# Altium PCB PCB2.PcbDoc
Units mil, origin at the board's own origin, x right, y up, seen from the top; angles counter-clockwise.
Board outline 2500 x 1400 mil, 2 copper layers (Top Layer, Bottom Layer); 26 components, 16 nets, 89 pads, 0 vias.
Unrouted connection lines stored in the file: 36.
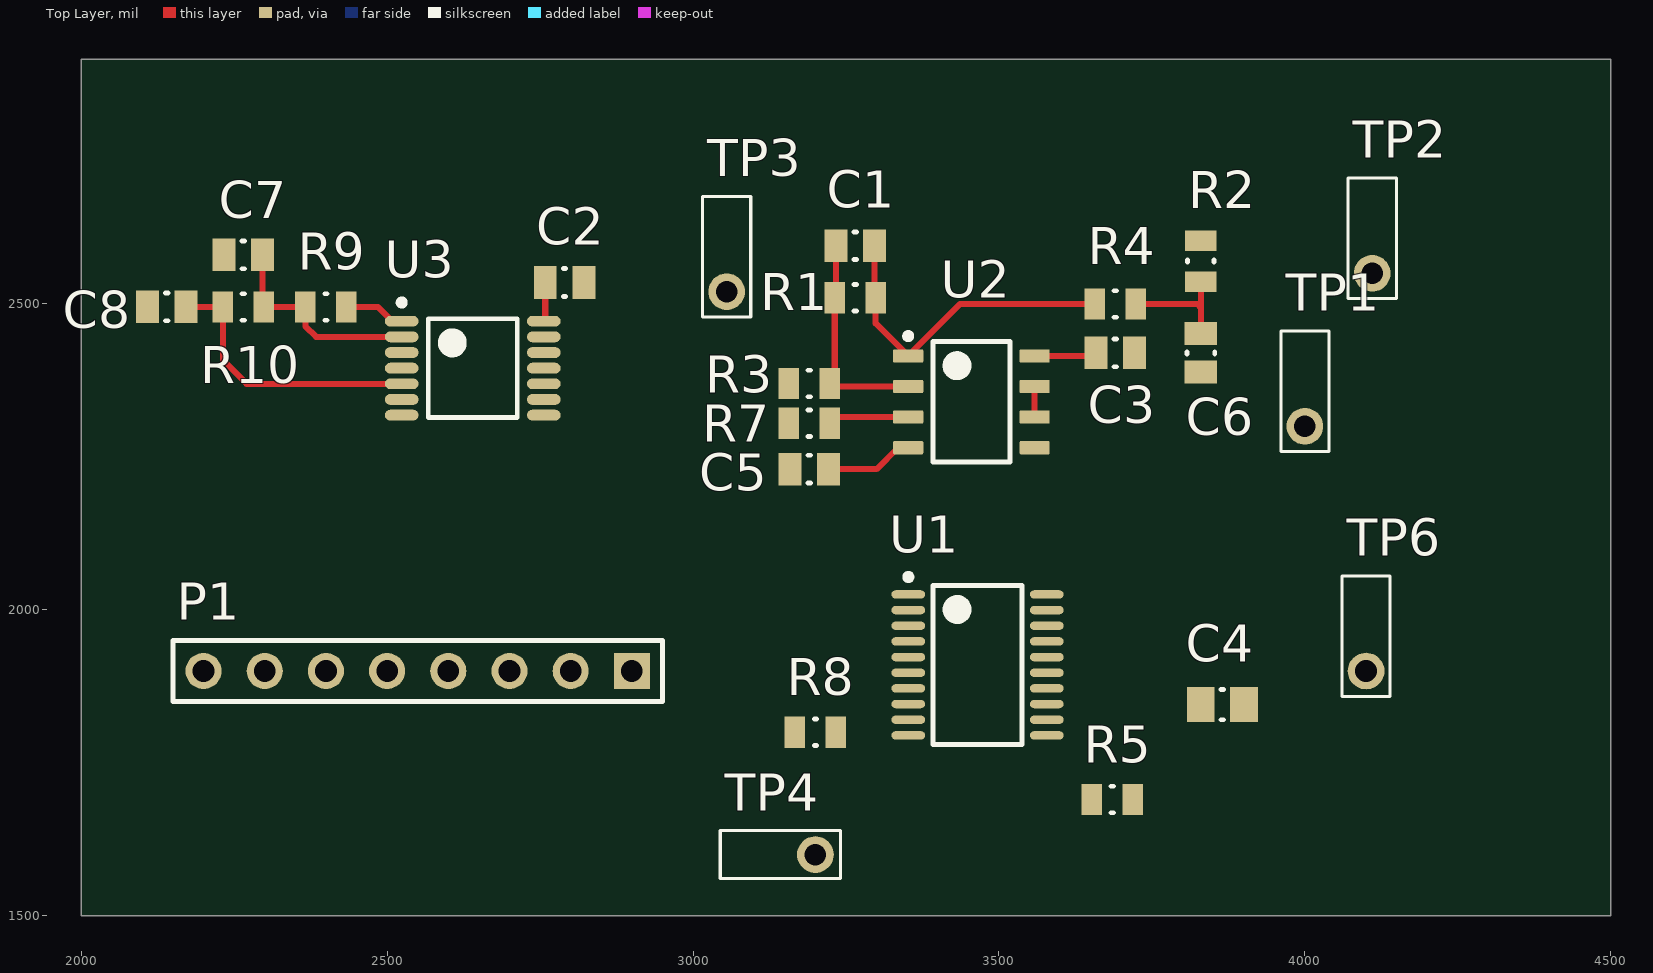
[diagram p0: Top Layer view]
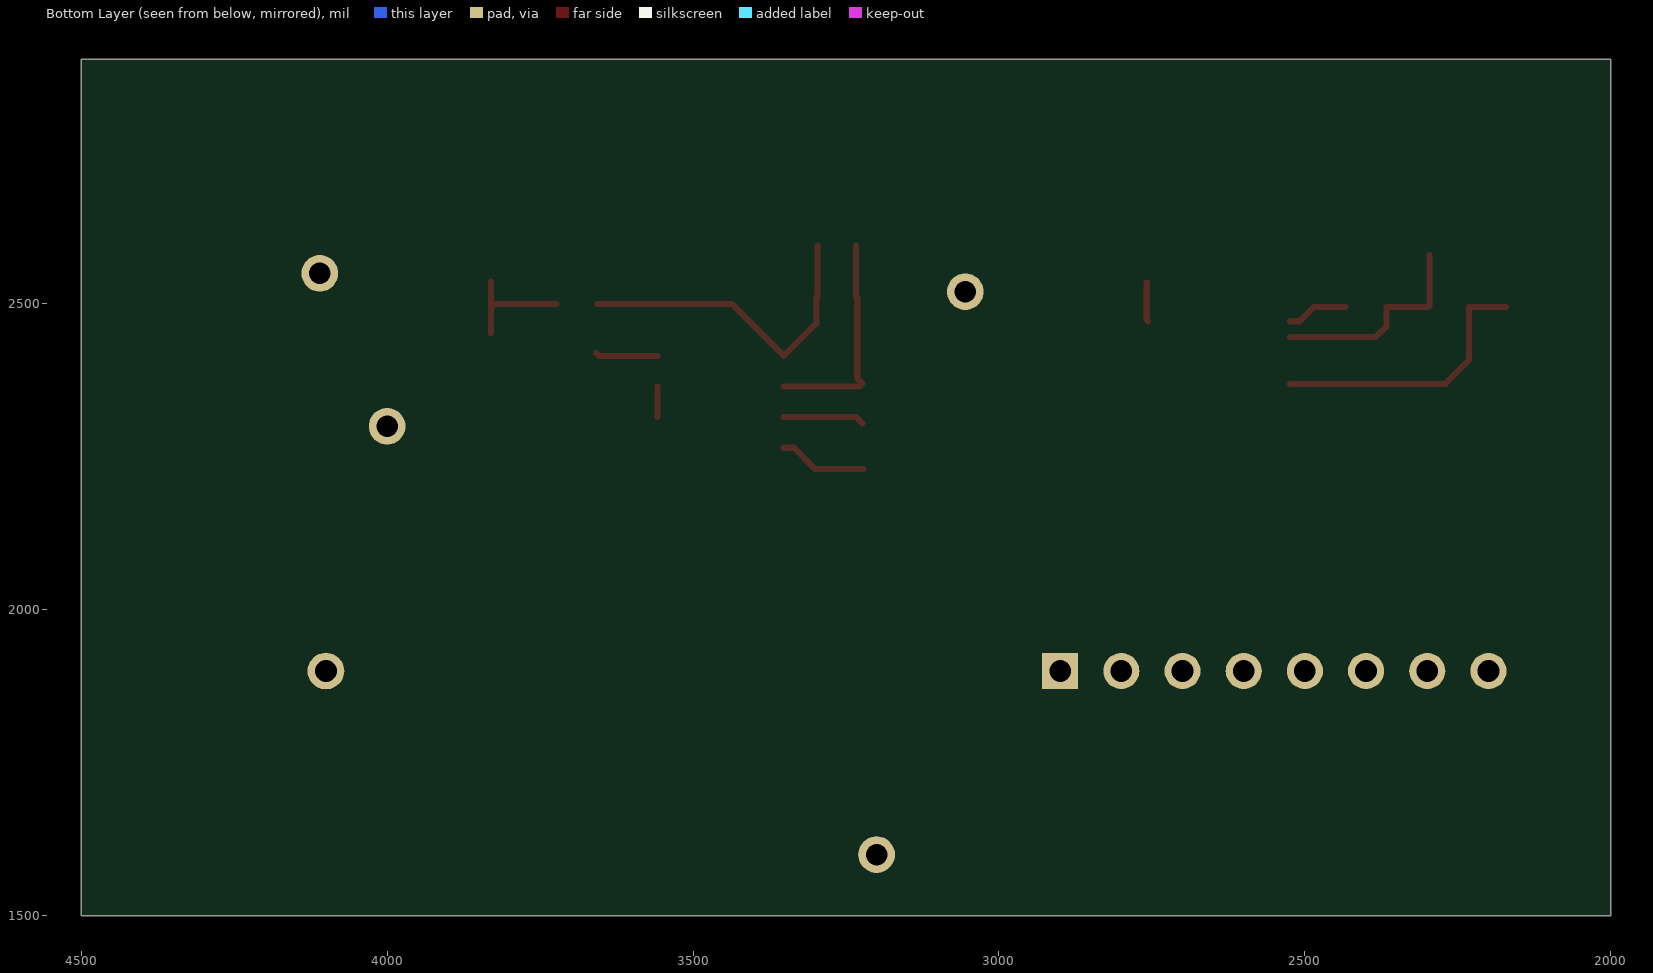
[diagram p1: Bottom Layer view, seen from below]

## Layer stack, top to bottom
Top Solder: solder mask 0.4, Solder Resist, Dk 3.5
Top Layer: signal copper 1.4
Dielectric 1: dielectric 12.6, FR-4, Dk 4.8
Bottom Layer: signal copper 1.4
Bottom Solder: solder mask 0.4, Solder Resist, Dk 3.5

## Board outline
2000,1500 4500,1500 4500,2900 2000,2900

## Design rules (kind name [scope] priority, off if disabled: settings)
Clearance [All] p1: gap=10 ignorepadtopadclearanceinfootprint=FALSE except(0: Arc-Hole Track-Hole SMDPad-Hole THPad-Hole Via-Hole Fill-Hole Poly-Hole Region-Hole Text-Hole)
PolygonConnect [All] p1: connectstyle=Relief reliefconductorwidth=10 reliefentries=4 polygonreliefangle="90 Angle" airgapwidth=10
RoutingVias [All] p1: holewidth=28 width=50 viastyle="Through Hole" minholewidth=28 minwidth=50 maxholewidth=28 maxwidth=50
SolderMaskExpansion [All] p1: expansion=4
Width [All] p1: maxlimit=10 minlimit=10 preferedwidth=10
30 further rules are at their usual default settings.

## Components (designator, comment, footprint, x,y, rotation, side; value= is the part's Value field where it differs from the comment)
C1 "470nF" CAPC0805(2012)75_L 3265,2595 r0 top value=.47uF
C2 ".1uF" CAPC0805(2012)75_L 2790,2535 r180 top
C3 ".1uF" CAPC0805(2012)75_L 3690,2420 r0 top
C4 "CAP CER 0.1UF 25V X7R 0805" CAPC0805(2012)145_N 3865,1845 r0 top
C5 ".1uF" CAPC0805(2012)75_L 3190,2230 r180 top
C6 "22uF" CAPC0805(2012)75_L 3830,2420 r90 top
C7 ".001uF" CAPC0805(2012)75_L 2265,2580 r0 top
C8 "470Pf" CAPC0805(2012)75_L 2140,2495 r0 top
P1 "Header 8" HDR1X8 2900,1900 r180 top
R1 "300k" RESC0805(2012)_L 3265,2510 r180 top
R2 "100k" RESC0805(2012)_L 3830,2570 r90 top
R3 "18.2k" RESC0805(2012)_L 3190,2370 r180 top
R4 "511k" RESC0805(2012)_L 3690,2500 r180 top
R5 "DNP" RESC0805(2012)_L 3685,1690 r0 top value=0
R7 "33k" RESC0805(2012)_L 3190,2305 r0 top
R8 "0" RESC0805(2012)_L 3200,1800 r0 top
R9 "43.2K" RESC0805(2012)_L 2400,2495 r180 top
R10 "10K" RESC0805(2012)_L 2265,2495 r0 top
TP1 "TP-TH-C-152-H90" TP-TH-C-152-H90 4000,2300 r90 top
TP2 "TP-TH-C-152-H90" TP-TH-C-152-H90 4110,2550 r90 top
TP3 "TP-TH-C-152-H90" TP-TH-C-152-H90 3055,2520 r90 top
TP4 "TP-TH-C-152-H90" TP-TH-C-152-H90 3200,1600 r180 top
TP6 "TP-TH-C-152-H90" TP-TH-C-152-H90 4100,1900 r90 top
U1 "MAX333CWP+" TSOP65P640X90-20N 3465,1910 r0 top
U2 "LPC662AIM" D0008A_L 3455,2340 r0 top
U3 "MC14584BDTR2G" MC14584BDTR2G 2640,2395 r0 top

## Footprints (in the part's own frame and the unit in brackets; to place one, negate y for a bottom-side part, rotate by r counter-clockwise, add the part's x,y. Pads: shape width x height; smd on the part's side, far side on the other; paste and mask are expansions set on the pad)
CAPC0805(2012)75_L [mm] "Chip Capacitor, Body 2.0x1.2mm, Height 0.75mm, IPC High Density"
  rect 0.95x1.35 smd: 1(-0.8,0) 2(0.8,0)
  silkscreen extent -0.05,-0.58 0.05,0.58, body extent -1.1,-0.72 1.1,0.72, height 0.75
CAPC0805(2012)145_N [mm] "Chip Capacitor, Body 2.0x1.2mm, Height 1.45mm, IPC Medium Density"
  rect 1.15x1.45 smd: 1(-0.9,0) 2(0.9,0)
  silkscreen extent -0.05,-0.62 0.05,0.63, body extent -1.1,-0.72 1.1,0.73, height 1.45
D0008A_L [mm] "SOIC, 8-Leads, Body 5x4mm, Pitch 1.27mm, IPC High Density"
  rrect18% 1.25x0.55 smd: 1(-2.625,1.905) 2(-2.625,0.635) 3(-2.625,-0.635) 4(-2.625,-1.905) 5(2.625,-1.905) 6(2.625,-0.635) 7(2.625,0.635) 8(2.625,1.905)
  silkscreen extent -2.75,-2.5 1.6,2.85, body extent -3,-2.45 3,2.45, height 1.63
HDR1X8 [mm] "Connector; Header; 8 Position"
  rect 1.5x1.5 hole 0.9: 1(0,0)
  round 1.5 hole 0.9: 2(2.54,0) 3(5.08,0) 4(7.62,0) 5(10.16,0) 6(12.7,0) 7(15.24,0) 8(17.78,0)
  silkscreen extent -1.27,-1.27 19.05,1.27
MC14584BDTR2G [mm]
  oval 1.4x0.45 smd: 1(-2.95,1.95) 2(-2.95,1.3) 3(-2.95,0.65) 4(-2.95,0) 5(-2.95,-0.65) 6(-2.95,-1.3) 7(-2.95,-1.95) 8(2.95,-1.95) 9(2.95,-1.3) 10(2.95,-0.65) 11(2.95,0) 12(2.95,0.65) 13(2.95,1.3) 14(2.95,1.95)
  silkscreen extent -3.07,-2.05 1.85,2.85, body extent -3.2,-2.07 3.2,2.07, height 1.2
RESC0805(2012)_L [mm] "Chip Resistor, Body 2.0x1.3mm, IPC High Density"
  rect 0.85x1.3 smd: 1(-0.85,0) 2(0.85,0)
  silkscreen extent -0.05,-0.55 0.05,0.55, body extent -1.1,-0.67 1.1,0.68, height 0.7
TP-TH-C-152-H90 [mil] "Test Point, Through Hole, Hole Size 0.9mm, PCB Mount with Silkscreen Box"
  round 60 hole 35.43: 1(0,0)
  silkscreen extent -41,-39 156,39
TSOP65P640X90-20N [mm] "TSOP, 20-Leads, Body 6.50x4.40mm, Pitch 0.65mm, IPC Medium Density"
  oval 1.4x0.35 smd: 1(-2.875,2.925) 2(-2.875,2.275) 3(-2.875,1.625) 4(-2.875,0.975) 5(-2.875,0.325) 6(-2.875,-0.325) 7(-2.875,-0.975) 8(-2.875,-1.625) 9(-2.875,-2.275) 10(-2.875,-2.925) 11(2.875,-2.925) 12(2.875,-2.275) 13(2.875,-1.625) 14(2.875,-0.975) 15(2.875,-0.325) 16(2.875,0.325) 17(2.875,0.975) 18(2.875,1.625) 19(2.875,2.275) 20(2.875,2.925)
  silkscreen extent -3,-3.3 1.85,3.77, body extent -2.25,-3.3 2.25,3.3, height 0.9

## Part data
C1 C2 C3 C5 C6 C7 C8: library part CMP-1036-02117-1, "CAP 150pF 16V ±10% 0805 (2012 Metric) Thickness 0.75mm SMD", Case-EIA=0805, Case-Metric=2012, Rated Voltage="16 V", Tolerance=±10%, Max Thickness="0.75 mm", Technology=SMT
C4: library part CMP-1036-04795-1, Capacitance=0.1µF, Manufacturer="Murata Electronics North America", Manufacturer Part Number=GRM21BR71E104KA01L, Operating Temperature="-55°C ~ 125°C", Package / Case="0805 (2012 Metric)", Ratings=-, Supplier Part Number 1=490-1673-6-ND, Temperature Coefficient=X7R, Tolerance=±10%, Voltage - Rated=25V, Applications="General Purpose", Category=Capacitors, ComponentLink1Description=http://www.murata.com/~/media/webrenewal/support/library/catalog/products/capacitor/mlcc/c02e.ashx, ComponentLink1URL=http://www.murata.com/~/media/webrenewal/support/library/catalog/products/capacitor/mlcc/c02e.ashx, Features=-, Height - Seated (Max)=-, Lead Spacing=-, Lead Style=-, Mounting Type="Surface Mount, MLCC", Packaging=Digi-Reel®, Part Status=Active, Pricing 1="1=0.2, 10=0.145, 100=0.0683, 500=0.04788, 1000=0.03964 (USD)", RoHS="RoHS Compliant", Size / Dimension="0.079\" L x 0.049\" W (2.00mm x 1.25mm)", Stock 1=891652, Supplier 1=Digi-Key, Thickness (Max)="0.053\" (1.35mm)"
P1: "Header, 8-Pin", LatestRevisionDate=17-Jul-2002, LatestRevisionNote="Re-released for DXP Platform.", Publisher="Altium Limited"
R1 R2 R3 R4 R5 R7 R8 R9 R10: library part CMP-1013-00215-1, "2R55 0.125W 1% 0805 (2012 Metric)  SMD", Case-EIA=0805, Case-Metric=2012, Power="0.125 W", Tolerance="1 %", Technology=SMT
TP1 TP2 TP3 TP4 TP6: library part CMP-0484-00003-2, "Test Point, Through Hole, Hole Size 0.9 mm, PCB Mount with Silkscreen Box", Manufacturer="No Vendor", PartNumber=TP-TH-C-152-H90
U1: "IC SWITCH QUAD SPDT 20TSSOP", Case/Package=TSSOP, Dual Supply Voltage=15V, Manufacturer=Maxim, Manufacturer Part Number=MAX333AEUP+, Max Dual Supply Voltage=20V, Max Operating Temperature=85°C, Max Power Dissipation=559mW, Max Supply Current=250uA, Max Supply Voltage=30V, Min Dual Supply Voltage=4.5V, Min Operating Temperature=-40°C, Min Supply Voltage=10V, On-State Resistance=35R, Operating Supply Current=1uA, Package Quantity=74, Supplier Part Number 1=700-MAX333AEUP, ComponentLink1Description=https://datasheet.ciiva.com/2978/max333a-2978850.pdf, ComponentLink1URL=https://datasheet.ciiva.com/2978/max333a-2978850.pdf, ComponentLink2Description=https://datasheet.ciiva.com/30478/0900766b81253c85-30478260.pdf, ComponentLink2URL=https://datasheet.ciiva.com/30478/0900766b81253c85-30478260.pdf, ComponentLink3Description=https://datasheet.ciiva.com/1674/max333a-1674617.pdf, ComponentLink3URL=https://datasheet.ciiva.com/1674/max333a-1674617.pdf, ComponentLink4Description=https://datasheet.ciiva.com/26825/max333aeup-26825546.pdf, ComponentLink4URL=https://datasheet.ciiva.com/26825/max333aeup-26825546.pdf, Height=0.95mm, Lead Free="Lead Free", Length=6.6mm, Number of Bits=4, Number of Channels=4, Number of Pins=20, Packaging=Rail/Tube, Pricing 1="1=6.77, 10=6.43, 50=5.8, 100=5.8, 1000=5.62, 10000=5.62 (USD)", Radiation Hardening=No, REACH SVHC=Unknown, Stock 1=664, Supplier 1=Mouser, Supply Type=Single,Dual, Throw Configuration=SPDT, Turn-Off Delay Time=145ns, Turn-On Delay Time=175ns, Weight=0.006737oz, Width=4.5mm
U2: library part CMP-0055-00867-3, "Low Power CMOS Dual Operational Amplifier, 8-pin Narrow SOIC", Manufacturer="Texas Instruments", Package Reference=D0008A, PackageTopMarking=NSZXTT*LPC66*2AIM, PowerWise=N, Code_IPC=SOIC127P600-8, Code_JEDEC=MS-012-AA, ComponentLink1Description="Datasheet URL", ComponentLink1URL=http://www.ti.com/general/docs/lit/getliterature.tsp?genericPartNumber=LPC662&fileType=pdf, CompType=Amplifiers, PackageDescription="SOIC Narrow, 4.9 x 3.9 x 1.45mm, 8 Lead, 1.27mm Pitch", PartId=1, PinCount=8, RoHS=N
U3: Base Part Number=4584, Current - Output High, Low="8.8mA, 8.8mA", Manufacturer="ON Semiconductor", Operating Temperature="-55°C ~ 125°C", Package / Case="14-TSSOP (0.173\", 4.40mm Width)", Supplier Device Package=14-TSSOP, Supplier Part Number 1=MC14584BDTR2GOSCT-ND, Voltage - Supply="3 V ~ 18 V", Category="Integrated Circuits (ICs)", ComponentLink1Description=http://www.onsemi.com/pub/Collateral/MC14584B-D.PDF, ComponentLink1URL=http://www.onsemi.com/pub/Collateral/MC14584B-D.PDF, Features="Schmitt Trigger", Logic Level - High="3.4 V ~ 10.5 V", Logic Level - Low="1.6 V ~ 4.6 V", Logic Type=Inverter, Manufacturer Part Number=MC14584BDTR2G, Max Propagation Delay @ V, Max CL="80ns @ 15V, 50pF", Mounting Type="Surface Mount", Number of Inputs=6, Packaging="Cut Tape (CT)", Part Status=Active, Pricing 1="1=0.5, 10=0.43, 100=0.3213, 500=0.25242, 1000=0.19506 (USD)", RoHS="RoHS Compliant", Stock 1=5429, Supplier 1=Digi-Key

## Nets (pads, with @x,y where several pads share a name; then routed paths per layer and width w, separated by ;. In a path a pad name is that pad's centre, name@x,y a point inside that pad or via, vN(x,y) a via of type N, cw(c..) or ccw(c..) an arc to the next point about the centre after c; other vN are vias at no path point)
+5: C3.1 P1.4 R2.2 U2.8 | length 102.2
  Top Layer w10: U2.8 3653.5,2415 C3.1
+9: C2.2 P1.5 U1.16 U3.14 | length 64.2
  Top Layer w10: U3.14 2758.5,2474.13 C2.2
-5: C4.1 C5.1 P1.6 U1.5 U2.4 | length 144.7
  Top Layer w10: C5.1 3300,2230 3335,2265 U2.4
BEAM: P1.3 TP2.1 U1.14
"Beam Sync Demod Out": C6.2 P1.1 R2.1 R4.1 TP1.1 | length 194.1
  Top Layer w10: R4.1 3824.02,2500 3830,2494.02 ; C6.2 3830,2494.02 ; R2.1 3830,2494.02
Beam_mod: R3.2 TP3.1 U1.13
D2: C8.2 R10.1 U3.5 | length 455.1
  Top Layer w10: C8.2 R10.1 2231.54,2408.46 2270.59,2369.41 U3.5
GND: C2.1 C3.2 C4.2 C5.2 C6.1 C7.1 C8.1 P1.7 P1.8 R7.1 U1.12 U2.5 U3.3 U3.7 U3.9 U3.11 U3.13
NetC1_1: C1.1 R1.2 R3.1 U2.2 | length 359.4
  Top Layer w10: C1.1 3233.5,2511.97 R1.2 3231.54,2378.07 R3.1 3228.46,2365 U2.2
NetC1_2: C1.2 R1.1 R4.2 U2.1 | length 542.9
  Top Layer w10: C1.2 3296.5,2511.97 R1.1 3298.46,2468.19 U2.1 3436.65,2500 R4.2
NetR7_2: R7.2 U2.3 | length 132.3
  Top Layer w10: R7.2 3233.46,2315 U2.3
NetR9_1: R9.1 U3.1 | length 100
  Top Layer w10: R9.1 2485,2495 2508.23,2471.77 U3.1
NetU2_6: U2.6 U2.7 | length 50
  Top Layer w10: U2.6 U2.7
PWM1A_DELAY: R8.1 TP6.1 U3.6
PWM_IN: C7.2 P1.2 R5.1 R9.2 R10.2 TP4.1 U3.2 | length 349.9
  Top Layer w10: C7.2 2296.5,2496.97 R10.2 R9.2 2366.54,2463.46 2383.82,2446.18 U3.2
Sync_clk: R5.2 R8.2 U1.11
pads on no net: U1.1 U1.2 U1.3 U1.4 U1.6 U1.7 U1.8 U1.9 U1.10 U1.15 U1.17 U1.18 U1.19 U1.20 U3.4 U3.8 U3.10 U3.12

## Dimensions
2000,1500 to 2000,2900 on Mechanical 13